# EAGLE board DVforArduino (EAGLE 6.4)
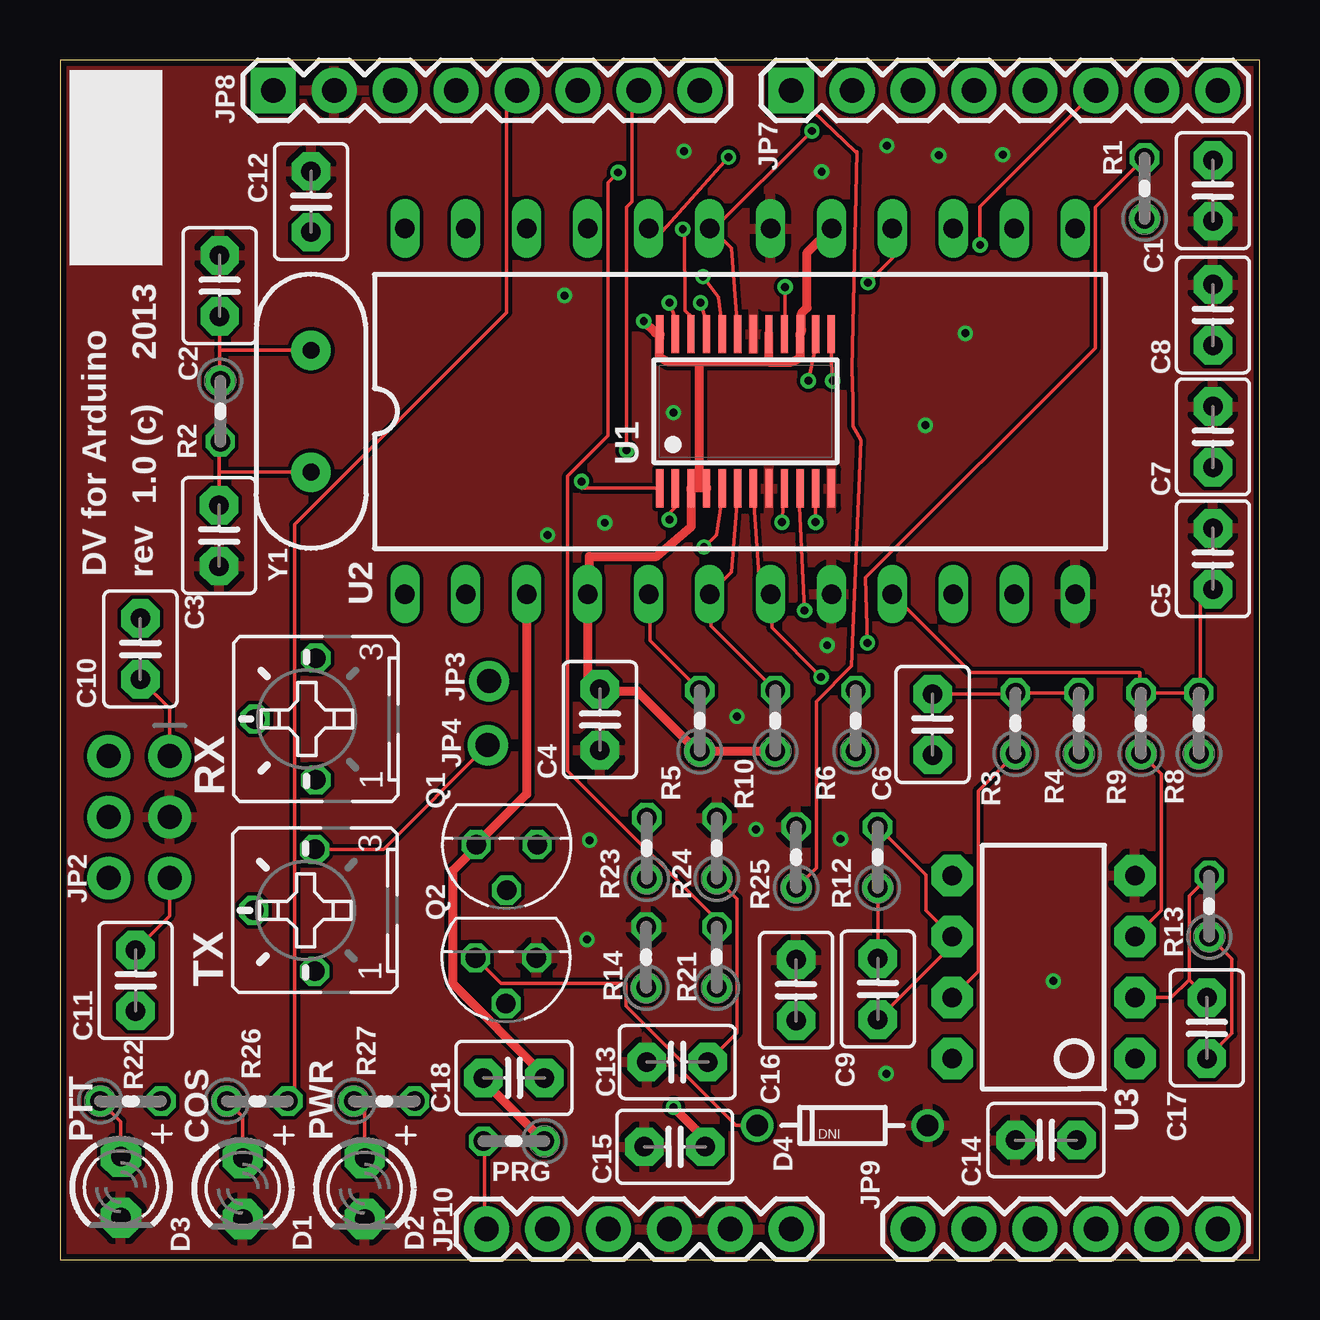
[diagram p0: board, top side]
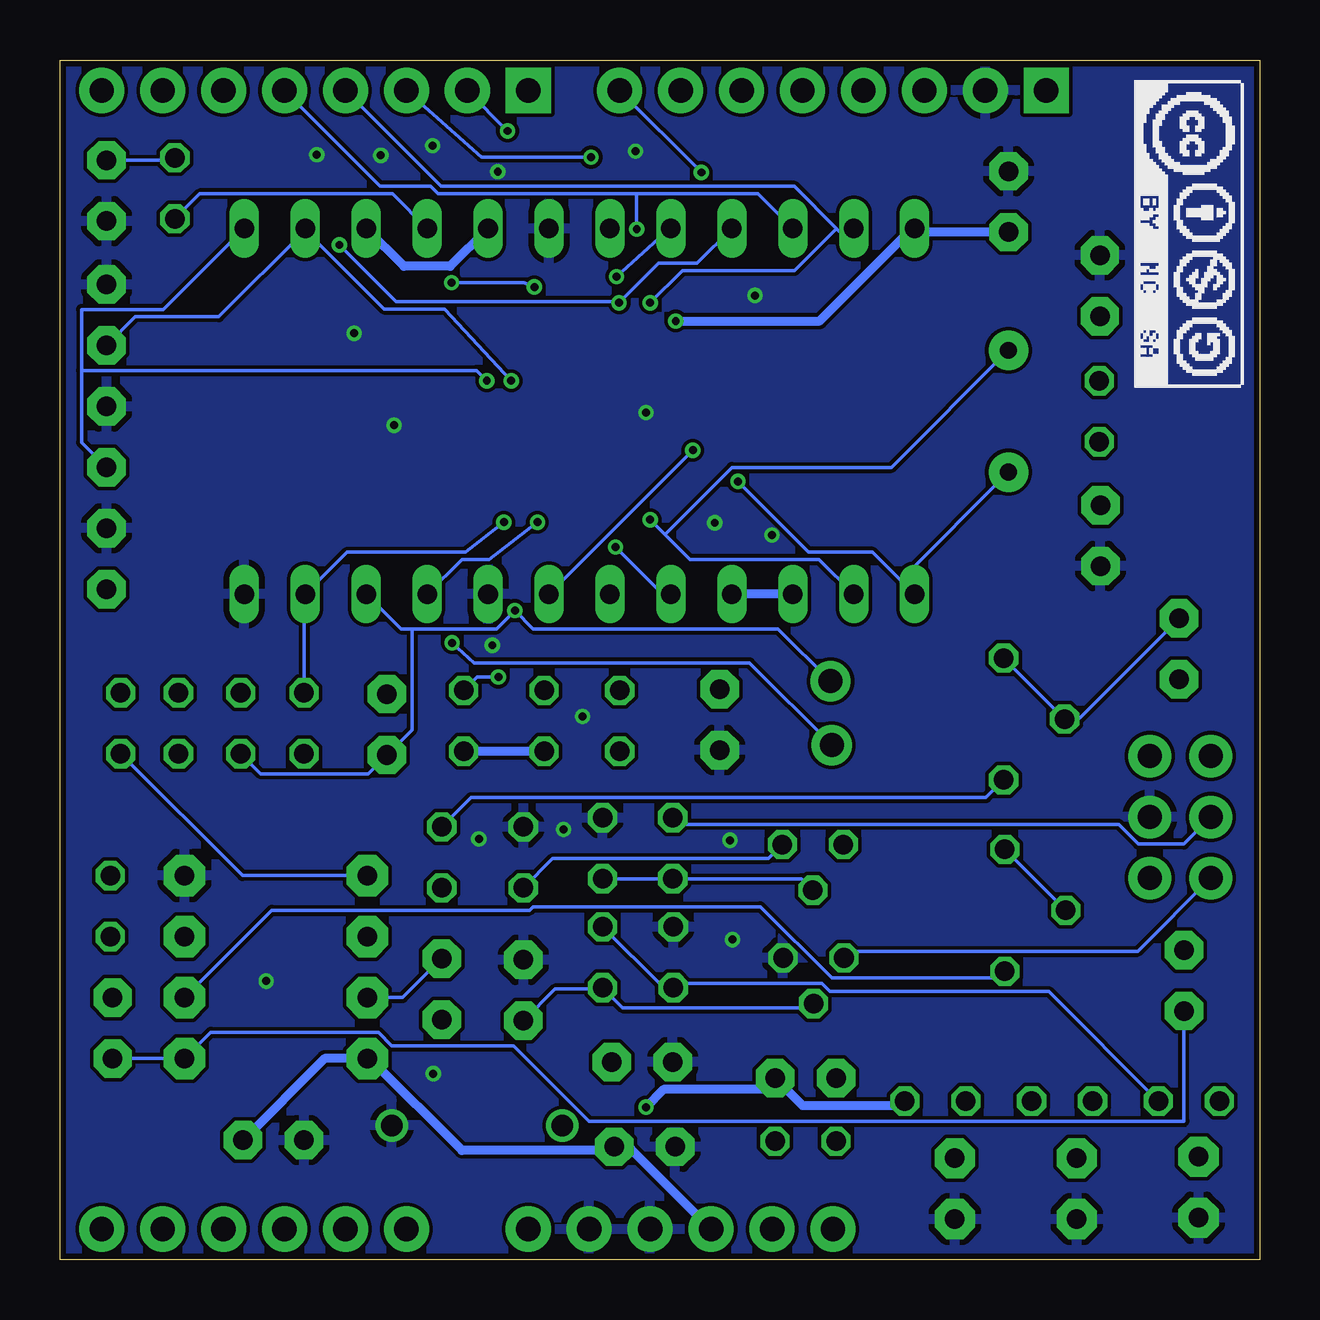
[diagram p1: board, bottom side, seen from below]

Size 50 x 50 mm. Coordinates in mm from the lower left corner, seen from the top.
Outline: 0,0 50,0 50,50 0,50 0,0
Copper layers (1*2*15*16): Top 0.035mm / dielectric 0.2mm / layer 2 0.0175mm / dielectric 1.1mm / layer 15 0.0175mm / dielectric 0.2mm / Bottom 0.035mm
Design rules "SeeedStudio_DRU_no_angle_20130527": minimum track width 6mil, minimum drill 12mil, track to track 6mil, track to pad 6mil, pad to pad 6mil, via to via 6mil, smd to smd 0mil, copper to edge 10mil, drill to drill 10mil, minimum pad ring 6mil, minimum via ring 6mil, stop-mask expansion 2mil, vias tented up to drill 25mil, thermal gap 10mil
Net classes: 1 pwr: width 0.381 mm

## Footprints (pad centres in the part's own frame; a part is rotated, then mirrored left to right if it is on the bottom)
C2.5-3 = drill 0.813 pad 1.6 octagon: 1 -1.27,0; 2 1.27,0
LED3MM = drill 0.813 pad 1.676 octagon: A -1.27,0; K 1.27,0
DIODE-ZENER = drill 0.9: P$1 -3.556,0; P$2 3.556,0
2X03_ROUND_70MIL = drill 1 pad 1.778: 1 -2.54,1.27; 2 -2.54,-1.27; 3 0,1.27; 4 0,-1.27; 5 2.54,1.27; 6 2.54,-1.27
1X01_ROUND = drill 1 pad 1.676: 1 0,0
1X08 = drill 1.016 pad 1.88 square: 1 0,0 | drill 1.016 pad 1.88: 2 2.54,0; 3 5.08,0; 4 7.62,0; 5 10.16,0; 6 12.7,0; 7 15.24,0; 8 17.78,0
1X06 = drill 1.016 pad 1.88: 1 0,0; 2 2.54,0; 3 5.08,0; 4 7.62,0; 5 10.16,0; 6 12.7,0
0204V = drill 0.813 octagon: 1 -1.27,0; 2 1.27,0
TO92 = drill 0.813 octagon: 1 1.27,0; 2 0,1.905; 3 -1.27,0
B25P = drill 0.813 octagon: A -2.54,0; E 2.54,0; S 0,2.54
AIS_MK2_CML-MICRO_TSSOP24 = smd 0.305 x 1.6: 1 -3.575,-3.217; 2 -2.925,-3.217; 3 -2.275,-3.217; 4 -1.625,-3.217; 5 -0.975,-3.217; 6 -0.325,-3.217; 7 0.325,-3.217; 8 0.975,-3.217; 9 1.625,-3.217; 10 2.275,-3.217; 11 2.925,-3.217; 12 3.575,-3.217; 13 3.575,3.217; 14 2.925,3.217; 15 2.275,3.217; 16 1.625,3.217; 17 0.975,3.217; 18 0.325,3.217; 19 -0.325,3.217; 20 -0.975,3.217; 21 -1.625,3.217; 22 -2.275,3.218; 23 -2.925,3.217; 24 -3.575,3.217
AIS_MK2_CML-MICRO_DIL24-6 = drill 0.813 long: 1 -13.97,-7.62; 2 -11.43,-7.62; 3 -8.89,-7.62; 4 -6.35,-7.62; 5 -3.81,-7.62; 6 -1.27,-7.62; 7 1.27,-7.62; 8 3.81,-7.62; 9 6.35,-7.62; 10 8.89,-7.62; 11 11.43,-7.62; 12 13.97,-7.62; 13 13.97,7.62; 14 11.43,7.62; 15 8.89,7.62; 16 6.35,7.62; 17 3.81,7.62; 18 1.27,7.62; 19 -1.27,7.62; 20 -3.81,7.62; 21 -6.35,7.62; 22 -8.89,7.62; 23 -11.43,7.62; 24 -13.97,7.62
DIP08 = drill 0.813 pad 1.727 octagon: 1 -3.81,-3.81; 2 -1.27,-3.81; 3 1.27,-3.81; 4 3.81,-3.81; 5 3.81,3.81; 6 1.27,3.81; 7 -1.27,3.81; 8 -3.81,3.81
HC49US = drill 0.7 pad 1.651: 1 -2.54,0; 2 2.54,0

## Placement (x,y rotation side)
C1  470p  [C2.5-3]  48.06,44.55 270 top
C2  30p  [C2.5-3]  6.65,40.59 270 top
C3  30p  [C2.5-3]  6.63,30.18 90 top
C4  0.1u  [C2.5-3]  22.5,22.5 270 top
C5  1u  [C2.5-3]  48.06,29.21 90 top
C6  22p  [C2.5-3]  36.37,22.3 90 top
C7  27n  [C2.5-3]  48.06,34.29 90 top
C8  27n  [C2.5-3]  48.06,39.37 90 top
C9  470p  [C2.5-3]  34.09,11.28 90 top
C10  0.1u  [C2.5-3]  3.35,25.45 90 top
C11  1u  [C2.5-3]  3.15,11.63 90 top
C12  100n  [C2.5-3]  10.46,44.09 90 top
C13  1u  [C2.5-3]  25.73,8.23 180 top
C14  100n  [C2.5-3]  41.1,4.98 180 top
C15  1u  [C2.5-3]  25.63,4.7 180 top
C16  100p  [C2.5-3]  30.68,11.23 90 top
C17  470p  [C2.5-3]  47.8,9.65 270 top
C18  10u  [C2.5-3]  18.92,7.57 0 top
D1  Green 3mm  [LED3MM]  7.62,2.95 270 top
D2  Yellow 3mm  [LED3MM]  12.7,2.95 270 top
D3  Red 3mm  [LED3MM]  2.54,3.01 270 top
D4  DNI  [DIODE-ZENER]  32.61,5.59 0 top
JP2  RADIO  [2X03_ROUND_70MIL]  3.3,18.44 270 top
JP3  RX_FB  [1X01_ROUND]  17.88,24.1 0 top
JP4  [1X01_ROUND]  17.83,21.44 0 top
JP7  [1X08]  30.48,48.73 0 top
JP8  [1X08]  8.89,48.73 0 top
JP9  [1X06]  35.56,1.27 0 top
JP10  [1X06]  17.78,1.27 0 top
PRG  DNI  [0204V]  18.92,4.93 180 top
Q1  2N7000  [TO92]  18.62,17.3 180 top
Q2  2N7000  [TO92]  18.59,12.57 180 top
R1  100k  [0204V]  45.21,44.65 90 top
R2  1M  [0204V]  6.68,35.36 270 top
R3  100k  [0204V]  39.83,22.35 90 top
R4  100k  [0204V]  42.47,22.35 90 top
R5  47k  [0204V]  26.67,22.45 90 top
R6  47k  [0204V]  33.17,22.45 90 top
R8  47k  [0204V]  47.47,22.35 90 top
R9  47k  [0204V]  45.06,22.35 90 top
R10  47k  [0204V]  29.82,22.45 90 top
R12  100k  [0204V]  34.09,16.76 90 top
R13  100k  [0204V]  47.9,14.73 90 top
R14  47K  [0204V]  24.43,12.6 90 top
R21  330  [0204V]  27.38,12.6 90 top
R22  2.7K  [0204V]  2.95,6.6 0 top
R23  330  [0204V]  24.46,17.14 90 top
R24  1M  [0204V]  27.38,17.14 90 top
R25  100K  [0204V]  30.68,16.76 90 top
R26  2.7K  [0204V]  8.23,6.6 0 top
R27  2.7K  [0204V]  13.51,6.6 0 top
RX  200K  [B25P]  10.67,22.53 90 top
TX  500K  [B25P]  10.62,14.55 90 top
U1  CML-MICRO_CMX589AE2  [AIS_MK2_CML-MICRO_TSSOP24]  28.57,35.36 0 top
U2  CML-MICRO_CMX589AP4  [AIS_MK2_CML-MICRO_DIL24-6]  28.35,35.36 0 top
U3  OPAMP-DUALDIP  [DIP08]  41,12.19 90 top
Y1  4.9152MHz  [HC49US]  10.46,35.36 270 top

## Library data of the parts
C1-C18 = capacitor-wima
D1-D3 = adafruit
D4 = SparkFun-DiscreteSemi
JP2-JP4 = microbuilder
JP7-JP10 = SparkFun-Connectors
PRG R1-R6 R8-R10 R12-R14 R21-R27 = resistor
Q1 Q2 = transistor-fet
RX TX = pot
U1 = mylibrary
U2 = 12_dollar
U3 = SparkFun-AnalogIC
Y1 = SparkFun-FreqCtrl

## Nets
+3V3 [pwr]: C4.1 C12.1 C14.1 C15.1 C18.2 JP10.3 Q1.1 R5.1 R6.1 R10.1 R27.2 U1.3 U1.4 U1.15 U1.17 U1.24 U2.3 U2.4 U2.15 U2.17 U2.24 U3.8
COS: JP7.1 Q1.3 R25.1
COS_LED: JP8.5 R26.2
DEBUG: JP8.4
DOC1: C7.1 U1.13 U2.13
DOC2: C8.1 U1.14 U2.14
GND [pwr]: C1.2 C2.1 C3.1 C4.2 C5.2 C7.2 C8.2 C12.2 C13.2 C14.2 C15.2 C16.2 D1.K D2.K D3.K D4.P$2 JP2.3 JP8.2 JP10.4 JP10.5 Q2.3 R14.2 R24.2 R25.2 U1.8 U1.12 U1.18 U2.8 U2.12 U2.18 U3.4
N$1: C13.1 Q1.2 R23.1 R24.1
N$2: D1.A R26.1
N$3: C10.2 RX.E RX.S
N$4: D2.A R27.1
N$6 [pwr]: C18.1 PRG.1
N$7: C9.1 R12.2 RX.A U3.6
N$11: R8.1 U3.5
N$15: C11.1 C17.2 R13.1 U3.1
N$20: R9.1 U3.3
N$24: C16.1 Q2.2 R21.1
N$28: C17.1 R13.2 TX.A U3.2
N$33: D3.A R22.1
PLLACQ: JP8.7 R6.2 U1.7 U2.7
PTT: JP8.8 R14.1 R21.2 R22.2
RADIO_COS: JP2.4 R23.2
RADIO_PTT: D4.P$1 JP2.6 Q2.1
RADIO_RX: C10.1 JP2.1
RADIO_TX: C11.2 JP2.5
RESET: JP10.1 PRG.2
RX_FB: C6.1 JP3.1 R4.1 U1.10 U2.10
RX_SN: JP7.4 U1.23 U2.23
RXCLK: JP7.6 U1.21 U2.21
RXDATA: JP7.3 U1.20 U2.20
RXDCACQ: R10.2 U1.6 U2.6
RXHOLDN: R5.2 U1.5 U2.5
RXSIGNAL: C6.2 R3.2 R4.2 U1.11 U2.11
RXSIGNAL_R: C9.2 R3.1 R12.1 U3.7
TXCLK: JP7.5 U1.22 U2.22
TXDATA: JP7.2 U1.19 U2.19
TXOUT: R1.1 U1.16 U2.16
TXOUT_R: C1.1 JP4.1 R1.2 TX.E TX.S
VBIAS: C5.1 R8.2 R9.2 U1.9 U2.9
XTAL: C2.2 R2.1 U1.2 U2.2 Y1.1
XTALN: C3.2 R2.2 U1.1 U2.1 Y1.2

## Tracks (layer width: path | path; a pad name or v marks a point on that pad's centre or on a via)
+3V3  (via drill 0.33)
  Top 0.381: R10.1 R5.1 26.49,21.26 24.05,23.7 22.68,23.7 C4.1 22,24.28 U2.4 22.07,27.91 22.07,29.31 24.87,29.31 26.31,30.56 26.31,31.93 U1.3 26.31,32.16 26.64,32.16 | U2.3 19.46,19.41 Q1.1 17.27,17.12 16.36,16.2 16.36,11.51 20.12,7.75 C18.2 | C15.1 26.64,4.95 26.64,5.28 v25.58,6.35 | 26.64,32.16 26.95,32.16 U1.4 | 29.54,37.41 26.64,37.41 | 26.64,37.41 25.35,37.41 24.99,37.59 24.99,38.41 25.02,38.56 U1.24 24.82,38.63 v24.33,39.12 | 29.54,37.41 29.54,38.56 U1.17 | 29.54,37.41 30.48,37.41 30.86,37.59 30.86,38.38 30.84,38.56 U1.15 30.91,38.76 30.91,39.45 31.14,39.67 31.14,41.96 U2.17 | 26.64,37.41 26.64,32.16
  Bottom 0.381: C14.1 38.96,8.38 U3.8 37.01,8.31 33.25,4.55 27,4.55 C15.1 26.72,4.62 26.21,4.62 JP10.3 | R27.2 14.96,6.43 19.05,6.43 C18.2 19.96,7.09 24.84,7.09 v25.58,6.35 | R10.1 R6.1 | U2.3 U2.4 | C12.1 14.22,42.82 U2.24 14.55,42.9 18.34,39.12 v24.33,39.12 | U2.15 35.66,41.4 33.73,41.4 U2.17
COS
  Top 0.152: R25.1 31.52,16.33 31.52,23.27 32.99,24.74 33.38,34.16 33.05,34.75 33.05,35.84 33.02,37.13 33.22,46.18 33.15,46.18 30.48,48.72 JP7.1
  Bottom 0.152: Q1.3 20.47,16.71 29.46,16.71 R25.1
COS_LED
  Top 0.152: R26.2 9.78,6.88 9.78,30.63 18.62,39.47 18.62,48.28 19.05,48.72 JP8.5
DOC1  (via drill 0.33)
  Top 0.152: v32.21,36.63 32.16,37.41 32.16,37.85 U1.13
  Bottom 0.152: C7.1 49.1,34.06 49.1,37.06 | 49.1,37.06 49.1,39.6 45.7,39.6 U2.13 | v32.21,36.63 32.64,37.06 49.1,37.06
DOC2  (via drill 0.33)
  Top 0.152: v31.19,36.63 31.6,38.48 31.52,38.56 U1.14
  Bottom 0.152: v31.19,36.63 33.96,39.62 36.5,39.62 39.78,42.9 U2.14 39.83,42.85 43.38,39.29 46.86,39.29 C8.1
GND  (via drill 0.33)
  other vias: 28.22,22.63 31.98,25.6 32.54,17.53 21.97,13.34 41.4,11.61 36.63,46.02 34.47,46.43 39.29,46.05 34.44,7.75 26.01,46.2 31.75,45.34 29.01,17.93 22.07,17.48 36.07,34.77 37.74,38.61 21.03,40.18 25.58,35.31 20.32,30.2 22.71,30.71
  pour Bottom: 0,49.99 49.99,49.99 49.99,0 0,0
  pour Top: 0,49.99 49.99,49.99 49.99,0 0,0
N$1
  Top 0.152: C13.1 28.22,9.45 28.22,15.04 R24.1
  Bottom 0.152: Q1.2 19.1,15.88 R23.1 R24.1
N$2
  Top 0.152: R26.1 7.62,5.94 D1.A
N$3
  Bottom 0.152: RX.E RX.S 8.08,22.58 7.49,22.58 C10.2
N$4
  Top 0.152: R27.1 12.7,6.15 D2.A
N$6
  Top 0.381: C18.1 17.65,7.44 20.17,4.93 PRG.1
N$7
  Top 0.152: R12.2 36.09,16.03 36.09,14.55 U3.6 37.13,13.41 37.13,13.06 C9.1
  Bottom 0.152: RX.A 11.4,19.25 32.87,19.25 R12.2
N$11
  Bottom 0.152: R8.1 42.39,16 U3.5
N$15
  Top 0.152: R13.1 48.84,12.52 48.84,9.42 C17.2
  Bottom 0.152: C11.1 3.15,5.77 27.94,5.77 31.09,8.91 36.17,8.91 36.73,9.47 43.71,9.47 U3.1 C17.2
N$20
  Top 0.152: R9.1 45.9,20.24 45.9,14.55 U3.3
N$24
  Bottom 0.152: Q2.2 18.77,10.49 26.54,10.49 R21.1 27.43,11.28 29.36,11.28 C16.1
N$28
  Top 0.152: R13.2 47.07,15.16 47.07,11.66 | C17.1 47.07,11.66 | 47.07,11.66 46.33,10.92 U3.2
  Bottom 0.152: TX.A 10.9,11.73 17.83,11.73 20.8,14.71 30.28,14.71 30.43,14.55 41.17,14.55 U3.2
N$33
  Top 0.152: R22.1 2.54,5.74 D3.A
PLLACQ  (via drill 0.33)
  Top 0.152: v31.73,24.28 29.67,26.34 29.67,27.69 U2.7 29.16,28.19 28.91,31.8 U1.7 | v23.62,33.73 23.62,43.87 23.85,44.09 23.85,48.44 24.13,48.72 JP8.7
  Bottom 0.152: R6.2 32.61,24.28 v31.73,24.28 | U2.7 v23.62,33.73
PTT  (via drill 0.33)
  Top 0.152: v23.27,45.31 22.84,44.88 22.84,34.34 21.16,32.66 21.16,20.37 27.38,14.15 R21.2
  Bottom 0.152: R22.2 8.79,11.18 17.91,11.18 18.24,11.51 24.26,11.51 R14.1 24.49,11.38 24.89,11.38 R21.2 | v23.27,45.31 26.67,48.72 JP8.8
RADIO_COS
  Bottom 0.152: R23.2 24.18,18.14 5.87,18.14 5.05,17.32 3.15,17.32 JP2.4
RADIO_PTT
  Top 0.152: Q2.1 18.39,11.51 23.6,11.51 23.6,10.57 25.96,8.2 25.96,7.8 28.17,5.59 D4.P$1
  Bottom 0.152: JP2.6 5.08,12.85 17.04,12.85 Q2.1
RADIO_RX
  Top 0.152: C10.1 4.57,22.96 JP2.1
RADIO_TX
  Top 0.152: C11.2 4.57,14.33 JP2.5
RESET
  Top 0.152: JP10.1 17.7,1.35 17.7,4.88 PRG.2
RX_FB  (via drill 0.33)
  Top 0.152: v31.04,27.05 30.81,31.83 30.86,32.13 U1.10
  Bottom 0.152: R4.1 41.63,20.24 37.16,20.24 C6.1 35.33,22.07 35.33,26.29 | 35.33,26.29 35.79,26.29 U2.10 | 35.33,26.29 31.8,26.29 v31.04,27.05 30.28,26.29 20.07,26.29 JP3.1
RX_SN  (via drill 0.33)
  Top 0.152: v25.4,39.88 25.63,39.27 25.63,38.58 U1.23
  Bottom 0.152: 17.63,42.98 17.32,42.67 U2.23 | 17.63,42.98 19.38,44.73 34.11,44.73 38.1,48.72 JP7.4 | v25.4,39.88 24.05,41.22 19.38,41.22 17.63,42.98
RXCLK  (via drill 0.33)
  Top 0.152: v26.7,39.88 26.98,39.01 26.95,38.58 U1.21 | v38.35,42.29 38.35,43.89 43.18,48.72 JP7.6
  Bottom 0.152: U2.21 23.44,41.53 25.04,41.53 v26.7,39.88 26.75,39.93 35.99,39.93 v38.35,42.29
RXDATA  (via drill 0.33)
  Top 0.152: 27.58,38.28 U1.20 27.56,38.63 27.61,38.76 27.46,40.11 v26.8,40.97 | v27.86,45.95 24.94,42.67 U2.20
  Bottom 0.152: v27.86,45.95 32.44,45.95 35.56,48.72 JP7.3 | v26.8,40.97 24.59,42.98 U2.20
RXDCACQ
  Top 0.152: R10.2 27.13,26.42 27.13,27.69 U2.6 27.99,28.65 28.25,31.75 U1.6
RXHOLDN  (via drill 0.33)
  Top 0.152: R5.2 24.59,25.81 24.59,27.69 U2.5 | v26.85,29.69 27.36,30.2 27.61,31.85 27.58,32.13 U1.5
  Bottom 0.152: v26.85,29.69 24.89,27.74 U2.5
RXSIGNAL  (via drill 0.33)
  Top 0.152: R4.2 R3.2 39.78,23.57 C6.2 | v31.5,30.73 31.5,31.77 31.52,32.13 U1.11
  Bottom 0.152: R3.2 39.83,27.69 U2.11 38.02,29.49 33.1,29.49 v31.5,30.73
RXSIGNAL_R
  Top 0.152: C9.2 R12.1 | R3.1 38.28,19.53 38.28,12.01 U3.7
  Bottom 0.152: C9.2 35.71,10.92 U3.7
TXCLK  (via drill 0.33)
  Top 0.152: v25.96,42.95 26.04,42.88 26.06,39.55 26.31,39.29 U1.22
  Bottom 0.152: 25.96,44.42 v25.96,42.95 | 25.96,44.42 20.9,44.42 U2.22 | 25.96,44.42 34.24,44.42 34.54,44.73 36.65,44.73 40.64,48.72 JP7.5
TXDATA  (via drill 0.33)
  Top 0.152: v31.34,47.04 27.23,42.93 U2.19 27.28,42.88 27.99,42.16 28.25,38.84 28.25,38.58 U1.19
  Bottom 0.152: v31.34,47.04 33.02,48.72 JP7.2
TXOUT  (via drill 0.33)
  Top 0.152: v30.23,40.54 30.23,38.86 30.2,38.58 U1.16 | v33.68,40.72 34.7,41.73 U2.16
  Bottom 0.152: R1.1 44.17,44.42 36.14,44.42 U2.16 | v30.23,40.54 30.66,40.72 v33.68,40.72
TXOUT_R  (via drill 0.33)
  Top 0.152: JP4.1 13.49,17.09 TX.E | R1.2 43.16,43.87 43.16,38 33.58,28.42 v33.66,25.7
  Bottom 0.152: R1.2 45.31,45.82 C1.1 | TX.E TX.S | v33.66,25.7 32.74,24.87 21.26,24.87 JP4.1
VBIAS  (via drill 0.33)
  Top 0.152: C5.1 47.52,27.41 47.52,23.67 R8.2 R9.2 45.01,23.67 45.01,24.46 37.97,24.46 U2.9 | v30.1,30.73 30.18,31.75 U1.9
  Bottom 0.152: v30.1,30.73 32.11,29.18 33.25,29.18 U2.9
XTAL  (via drill 0.33)
  Top 0.152: R2.1 6.66,36.65 6.66,37.9 | C2.2 6.66,37.9 | 6.66,37.9 Y1.1 | v25.4,30.84 25.4,31.11 25.63,31.34 U1.2
  Bottom 0.152: 24.79,30.23 23.75,29.18 18.36,29.18 U2.2 | 24.79,30.23 v25.4,30.84 | Y1.1 15.34,33.02 22,33.02 24.79,30.23
XTALN  (via drill 0.33)
  Top 0.152: R2.2 6.63,34.04 6.63,32.82 | C3.2 6.63,32.82 | 6.63,32.82 Y1.2 | v21.74,32.44 21.74,32.16 24.99,32.16 U1.1
  Bottom 0.152: v21.74,32.44 18.8,29.49 16.13,29.49 U2.1 14.91,28.37 Y1.2

## Text on the board
tNames: 2013 | 1.0 (c) | DV for Arduino | rev | PTT | COS | PWR